# EAGLE board DP-webplatformv1.2 (EAGLE 5.07)
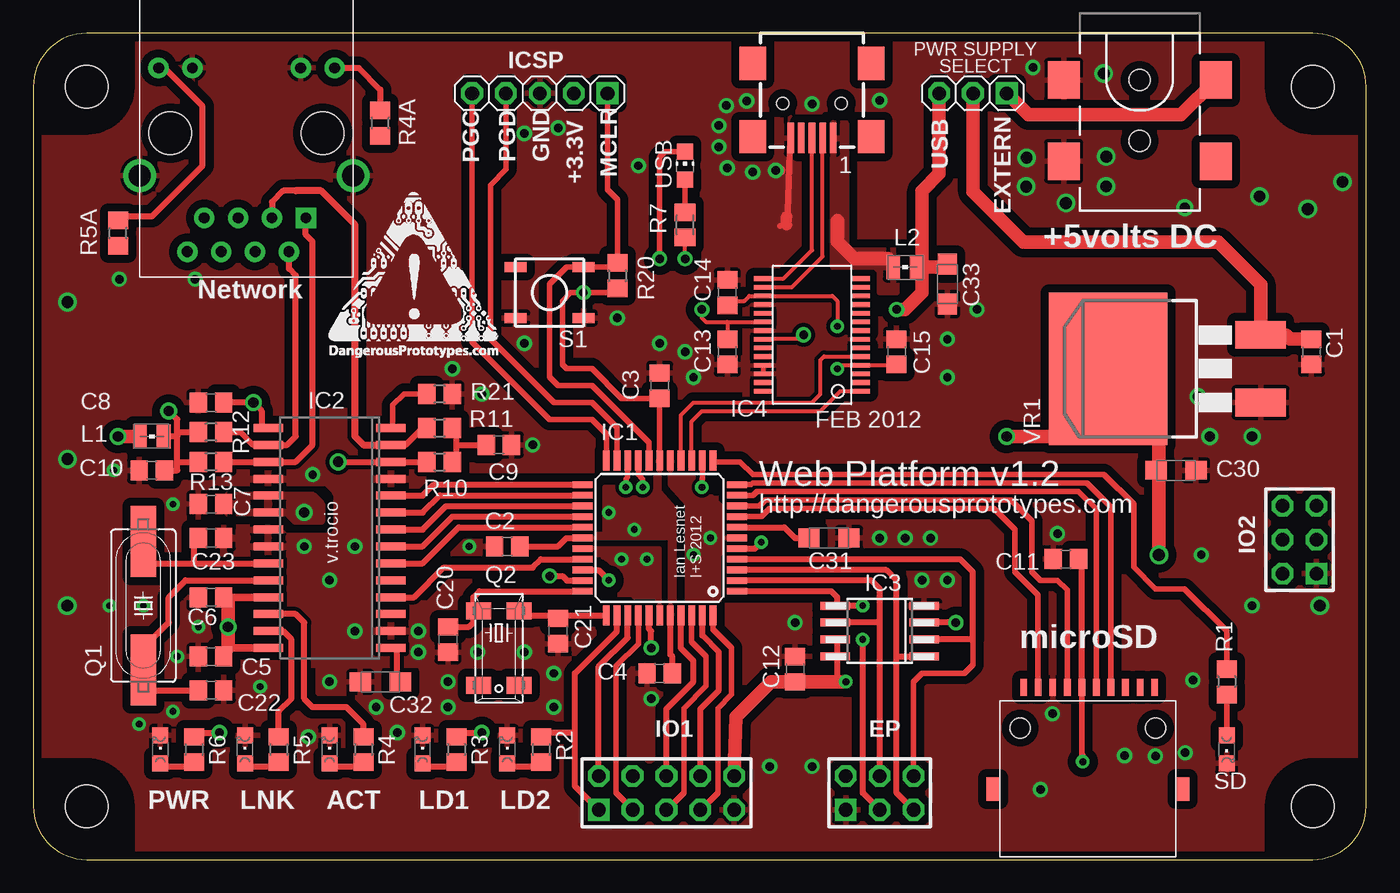
[diagram p0: board, top side]
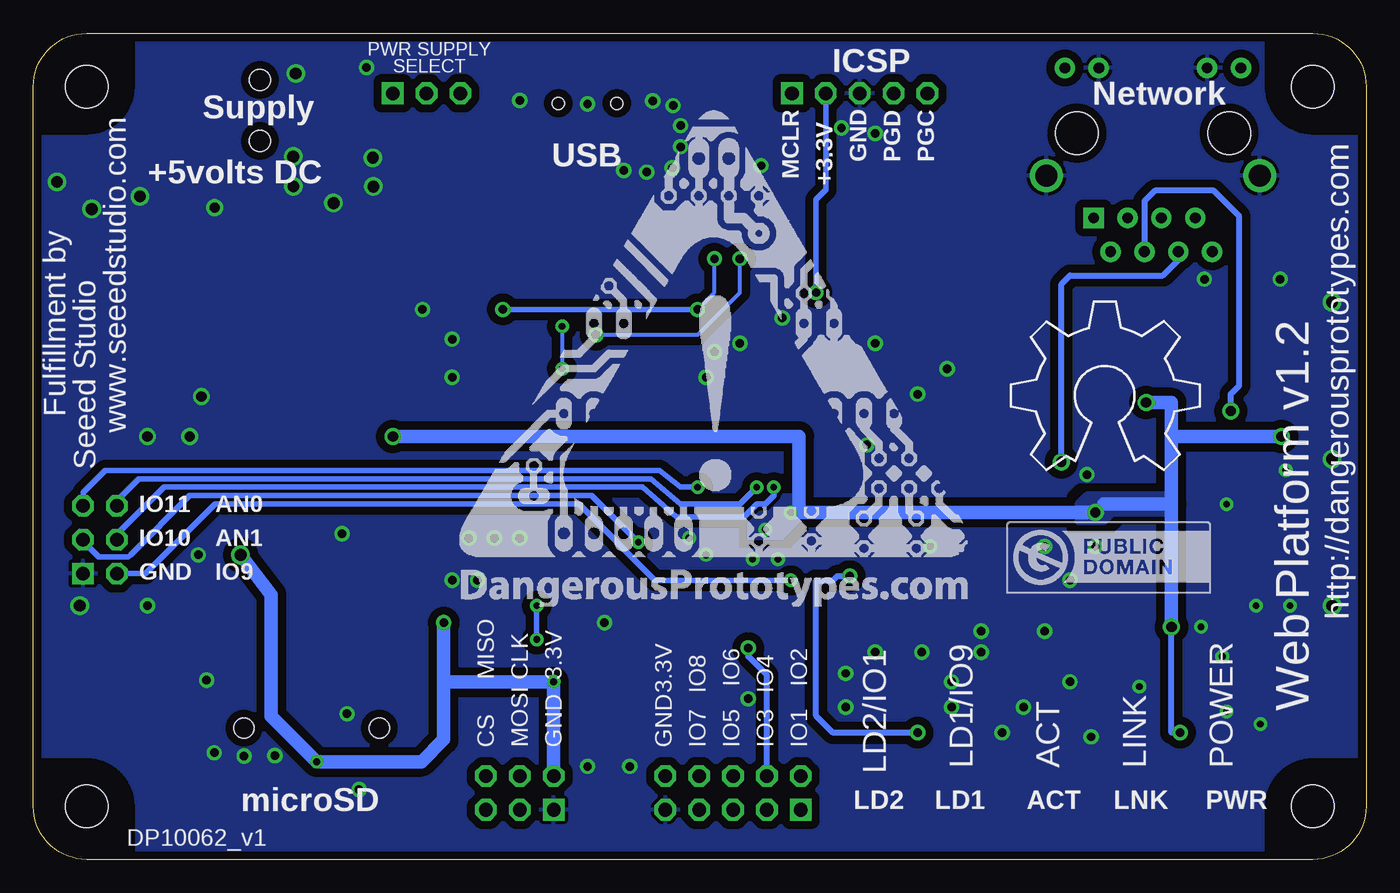
[diagram p1: board, bottom side, seen from below]

Size 100 x 62 mm. Coordinates in mm from the lower left corner, seen from the top.
Copper layers (1*16): Top 0.035mm / dielectric 1.5mm / Bottom 0.035mm
Design rules "SparkFun": minimum track width 8mil, minimum drill 20mil, track to track 8mil, track to pad 8mil, pad to pad 8mil, via to via 8mil, smd to smd 8mil, copper to edge 10mil, drill to drill 8mil, minimum pad ring 12mil, minimum via ring 10mil, stop-mask expansion 4mil, vias tented up to drill 25mil, thermal gap 10mil

## Footprints (pad centres in the part's own frame; a part is rotated, then mirrored left to right if it is on the bottom)
CHIPLED_0805 = smd 1.2 x 1.2: A 0,-1.05; C 0,1.05
C0805 = smd 1.3 x 1.5: 1 -0.95,0; 2 0.95,0
SMC_A = smd 1.6 x 1.4: + -1.5,0; - 1.5,0
CONN_USB_MINI-B = smd 0.5 x 2.3: D+ 0,2.6; D- -0.8,2.6; GND 1.6,2.6; P4 0.8,2.6; VUSB -1.6,2.6 | smd 2 x 2.5: PC1 -4.45,2.5; PC2 4.45,2.5; PC3 4.45,-3; PC4 -4.45,-3 | hole 0.9: -2.2,0; 2.2,0
2X03 = drill 1.016 square: 1 -2.54,-1.27 | drill 1.016 octagon: 2 -2.54,1.27; 3 0,-1.27; 4 0,1.27; 5 2.54,-1.27; 6 2.54,1.27
TQFP44 = smd 1.5 x 0.5: 1 -5.8,4; 2 -5.8,3.2; 3 -5.8,2.4; 4 -5.8,1.6; 5 -5.8,0.8; 6 -5.8,0; 7 -5.8,-0.8; 8 -5.8,-1.6; 9 -5.8,-2.4; 10 -5.8,-3.2; 11 -5.8,-4; 23 5.8,-4; 24 5.8,-3.2; 25 5.8,-2.4; 26 5.8,-1.6; 27 5.8,-0.8; 28 5.8,0; 29 5.8,0.8; 30 5.8,1.6; 31 5.8,2.4; 32 5.8,3.2; 33 5.8,4 | smd 0.5 x 1.5: 12 -4,-5.8; 13 -3.2,-5.8; 14 -2.4,-5.8; 15 -1.6,-5.8; 16 -0.8,-5.8; 17 0,-5.8; 18 0.8,-5.8; 19 1.6,-5.8; 20 2.4,-5.8; 21 3.2,-5.8; 22 4,-5.8; 34 4,5.8; 35 3.2,5.8; 36 2.4,5.8; 37 1.6,5.8; 38 0.8,5.8; 39 0,5.8; 40 -0.8,5.8; 41 -1.6,5.8; 42 -2.4,5.8; 43 -3.2,5.8; 44 -4,5.8
SO28W = smd 0.6 x 2.2: 1 -8.255,-4.6; 2 -6.985,-4.6; 3 -5.715,-4.6; 4 -4.445,-4.6; 5 -3.175,-4.6; 6 -1.905,-4.6; 7 -0.635,-4.6; 8 0.635,-4.6; 9 1.905,-4.6; 10 3.175,-4.6; 11 4.445,-4.6; 12 5.715,-4.6; 13 6.985,-4.6; 14 8.255,-4.6; 15 8.255,4.6; 16 6.985,4.6; 17 5.715,4.6; 18 4.445,4.6; 19 3.175,4.6; 20 1.905,4.6; 21 0.635,4.6; 22 -0.635,4.6; 23 -1.905,4.6; 24 -3.175,4.6; 25 -4.445,4.6; 26 -5.715,4.6; 27 -6.985,4.6; 28 -8.255,4.6
SO-08M = smd 0.6 x 2.2: 1 -1.905,-3.33; 2 -0.635,-3.33; 3 0.635,-3.33; 4 1.905,-3.33; 5 1.905,3.33; 6 0.635,3.33; 7 -0.635,3.33; 8 -1.905,3.33
SSOP28 = smd 0.348 x 1.397: 1 -4.225,-3.656; 2 -3.575,-3.656; 3 -2.925,-3.656; 4 -2.275,-3.656; 5 -1.625,-3.656; 6 -0.975,-3.656; 7 -0.325,-3.656; 8 0.325,-3.656; 9 0.975,-3.656; 10 1.625,-3.656; 11 2.275,-3.656; 12 2.925,-3.656; 13 3.575,-3.656; 14 4.225,-3.656; 15 4.225,3.656; 16 3.575,3.656; 17 2.925,3.656; 18 2.275,3.656; 19 1.625,3.656; 20 0.975,3.656; 21 0.325,3.656; 22 -0.325,3.656; 23 -0.975,3.656; 24 -1.625,3.656; 25 -2.275,3.656; 26 -2.925,3.656; 27 -3.575,3.656; 28 -4.225,3.656
1X05-S = drill 1.016 square: 1 -5.08,0 | drill 1.016 octagon: 2 -2.54,0; 3 0,0; 4 2.54,0; 5 5.08,0
2X05 = drill 1.016 square: 1 -5.08,-1.27 | drill 1.016 octagon: 2 -5.08,1.27; 3 -2.54,-1.27; 4 -2.54,1.27; 5 0,-1.27; 6 0,1.27; 7 2.54,-1.27; 8 2.54,1.27; 9 5.08,-1.27; 10 5.08,1.27
POWER_JACK_SMD = smd 2.8 x 2.4: GND 0,-5.7; P$4 6.1,-5.7; VIN0 0,5.7; VIN1 6.1,5.7 | hole 1.6: 0,0; 4.572,0
HR911105A = drill 0.813 pad 1.524 square: 1 4.445,-6.35 | drill 0.813 pad 1.524 round: 2 3.175,-8.89; 3 1.905,-6.35; 4 0.635,-8.89; 5 -0.635,-6.35; 6 -1.905,-8.89; 7 -3.175,-6.35; 8 -4.445,-8.89; 9 6.604,4.902; 10 4.064,4.902; 11 -4.064,4.902; 12 -6.604,4.902 | drill 1.651 pad 2.159 round: 13 8.001,-3.175; 14 -8.001,-3.175 | hole 3.2: 5.715,0; -5.715,0
1X03-S = drill 1.016 square: 1 -2.54,0 | drill 1.016 octagon: 2 0,0; 3 2.54,0
WE-KI_0805_B = smd 1.02 x 1.78: 1 -0.89,0; 2 0.89,0
DP10062_V1 = hole 3.2: 4,4; 96,4; 96,58; 4,58
HC49UP = smd 5.334 x 1.93: 1 -4.826,0; 2 4.826,0
MM20SS = smd 1.27 x 1.88: 1 -2.794,-1.524; 2 2.794,-1.524; 3 2.794,1.524; 4 -2.794,1.524
R0805 = smd 1.3 x 1.5: 1 -0.95,0; 2 0.95,0
M0805 = smd 1.3 x 1.6: 1 -0.95,0; 2 0.95,0
TACT_SWITCH_SMALL = smd 1.651 x 0.762: 1 -2.54,1.905; 2 2.54,1.905; 3 -2.54,-1.905; 4 2.54,-1.905
CHIP-LED0805 = smd 1.2 x 1.2: A 0,-1.05; C 0,1.05
MICROSD = smd 1.27 x 0.508: 1 0,-7.645; 2 0,-6.553; 3 0,-5.461; 4 0,-4.369; 5 0,-3.277; 6 0,-2.184; 7 0,-1.092; 8 0,0; 9 0,-8.738; 10 0,-9.83 | smd 1.778 x 1.016: RSV1 -7.62,2.286; RSV2 -7.62,-11.938 | hole 1.524: -3.048,-9.906; -3.048,0.254
D2PACK = smd 2.083 x 3.81: 1 -2.54,-8.89; 3 2.54,-8.89 | smd 11.43 x 8.89: 2 0,2.54

## Placement (x,y rotation side)
ACT  [CHIPLED_0805]  22.23,8.26 0 top
C1  0.1uF  [C0805]  95.89,38.1 270 top
C2  0.1uF  [C0805]  35.56,23.5 180 top
C3  0.1uF  [C0805]  46.99,35.56 90 top
C4  0.1uF  [C0805]  46.99,13.97 180 top
C5  0.1uF  [C0805]  13.34,15.24 180 top
C6  0.1uF  [C0805]  13.34,19.68 180 top
C7  0.1uF  [C0805]  13.34,26.67 180 top
C8  0.1uF  [C0805]  13.34,34.29 180 top
C9  0.1uF  [C0805]  34.92,31.11 0 top
C10  0.1uF  [C0805]  8.89,29.21 180 top
C11  0.1uF  [C0805]  77.47,22.54 180 top
C12  0.1uF  [C0805]  57.15,14.29 90 top
C13  0.1uF  [C0805]  52.07,38.1 270 top
C14  0.1uF  [C0805]  52.07,42.55 90 top
C15  0.1uF  [C0805]  64.77,38.1 90 top
C20  27pf  [C0805]  31.11,16.51 270 top
C21  27pf  [C0805]  39.37,17.14 270 top
C22  27pf  [C0805]  13.34,12.7 0 top
C23  27pf  [C0805]  13.34,24.13 0 top
C30  10uF  [SMC_A]  85.72,29.21 0 top
C31  10uF  [SMC_A]  59.69,24.13 0 top
C32  10uF  [SMC_A]  26.04,13.34 180 top
C33  10uF  [SMC_A]  68.58,43.18 270 top
CONN1  CONN_USB  [CONN_USB_MINI-B]  58.42,56.75 180 top
EP  [2X03]  63.5,5 0 top
IC1  PIC33FJ128GP204  [TQFP44]  46.99,24.13 180 top
IC2  ENC28J60-SO  [SO28W]  22.23,24.13 90 top
IC3  25SM  [SO-08M]  63.5,17.14 90 top
IC4  FT232RL  [SSOP28]  58.42,39.37 90 top
ICSP  [1X05-S]  38,57.5 180 top
IO1  [2X05]  47.5,5 0 top
IO2  [2X03]  95,24 90 top
J1  POWER_JACKSMD  [POWER_JACK_SMD]  83,58.5 270 top
J3  HR911105A  [HR911105A]  16,54.5 0 top
JP1  [1X03-S]  70.5,57.5 180 top
L1  [WE-KI_0805_B]  8.89,31.75 0 top
L2  100mA+ ferrite bead  [WE-KI_0805_B]  65.41,44.45 180 top
LD1  [CHIPLED_0805]  29.21,8.26 0 top
LD2  [CHIPLED_0805]  35.56,8.26 0 top
LINK  [CHIPLED_0805]  15.88,8.26 0 top
LOGO1  LOGO_CC-0  [LOGO_CC-0]  26.98,19.99 0 bottom
PCB1  PCB_DP_RECTANGLE-6.2X10  [DP10062_V1]  0,0 0 top
PWR  [CHIPLED_0805]  9.53,8.26 0 top
Q1  25Mhz  [HC49UP]  8.26,19.05 90 top
Q2  32.768khz  [MM20SS]  34.92,15.88 270 top
R1  1K1  [R0805]  89.53,13.34 270 top
R2  1K1  [R0805]  38.1,8.26 270 top
R3  1K1  [R0805]  31.75,8.26 270 top
R4  1K1  [R0805]  24.77,8.26 270 top
R4A  1K1  [R0805]  26.04,55.26 90 top
R5  1K1  [R0805]  18.41,8.26 270 top
R5A  1K1  [R0805]  6.35,47.01 90 top
R6  1K1  [R0805]  12.06,8.26 270 top
R7  1K1  [M0805]  48.9,47.62 270 top
R10  49R9 1%  [R0805]  30.48,29.84 0 top
R11  49R9 1%  [R0805]  30.48,32.38 0 top
R12  49R9 1%  [R0805]  13.34,32.07 180 top
R13  49R9 1%  [R0805]  13.34,29.84 180 top
R20  2K  [R0805]  43.81,43.81 270 top
R21  2K32  [R0805]  30.48,34.92 180 top
S1  [TACT_SWITCH_SMALL]  38.73,42.55 0 top
SD  [CHIPLED_0805]  89.53,8.26 180 top
U$2  [DP_LOGO_ART_0.5X0.5]  22.18,37.68 0 top
U$3  [OSHW_8X500_NOTEXT]  26.67,29.21 0 bottom
U$5  [DP_LOGO_ART_1.5X1.5]  68,19 0 bottom
USB  [CHIP-LED0805]  48.9,52.07 0 top
USD  MICROSD  [MICROSD]  74.3,12.91 90 top
VR1  LD117AD2MTR  [D2PACK]  83.19,36.83 90 top

## Library data of the parts
ACT LD1 LD2 LINK PWR SD USB = led
C1-C15 C20-C23 C30-C33 R1-R4 R4A R5 R5A R6 R10-R13 R20 R21 = rcl
CONN1 IC4 LOGO1 PCB1 S1 = dp_devices
EP ICSP IO1 IO2 JP1 = pinhead-2
IC1 IC3 = microchip
IC2 = microchip-enc28j60
J1 = SparkFun
J3 = CONNECTER
L1 L2 = wuerth-elektronik
Q1 Q2 = crystal
R7 = resistor
U$2 U$5 = DP2
U$3 = ohw-logo
USD = Seeed
VR1 = v-reg

## Nets
5V+: C13.1 C33.+ IC4.20 JP1.3 L2.1 R7.2
AN0: IC1.19 IO2.6
AN1: IC1.20 IO2.4
BUS_PWR: CONN1.VUSB L2.2
CCT: C10.1 J3.4 L1.2 R12.2 R13.2
CTS: IC4.11
EE-CLK: EP.4 IC1.2 IC3.6
EE-CS: EP.5 IC1.3 IC3.1
EE-MISO: EP.6 IC1.4 IC3.2
EE-MOSI: EP.3 IC1.1 IC3.5
ETH-CLK: IC1.25 IC2.8
ETH-CS: IC1.24 IC2.9
ETH-INT: IC1.30 IC2.4
ETH-MISO: IC1.27 IC2.6
ETH-MOSI: IC1.26 IC2.7
ETH-RST: IC1.23 IC2.10
GND: ACT.C C1.2 C2.2 C3.2 C4.2 C5.2 C6.2 C7.2 C8.2 C9.2 C10.2 C11.2 C12.2 C13.2 C14.2 C15.2 C20.2 C21.2 C22.2 C23.2 C30.- C31.- C32.- C33.- CONN1.GND EP.1 IC1.6 IC1.16 IC1.29 IC1.39 IC2.2 IC2.11 IC2.18 IC2.21 IC2.22 IC3.4 IC4.7 IC4.18 IC4.21 IC4.25 IC4.26 ICSP.3 IO1.9 IO2.1 J1.GND J1.P$4 J3.10 J3.11 J3.13 J3.14 LD1.C LD2.C LINK.C PWR.C R21.1 S1.3 S1.4 SD.C USD.6 VR1.1
LED1: IC1.32 R3.1
LED_A: IC2.27 R5.1
LED_A2: R5A.1
LED_B: IC2.26 R4.1
LED_B2: R4A.1
LED_LINK: J3.9 R4A.2
LED_STATUS: J3.12 R5A.2
MCLR: IC1.18 ICSP.1 R20.1 S1.2
N$5: C20.1 IC1.33 Q2.1
N$6: C32.+ IC2.1
N$7: IC2.14 R21.2
N$9: C22.1 IC2.24 Q1.1
N$10: R7.1 USB.A
N$11: R1.2 SD.A
N$12: C23.1 IC2.23 Q1.2
N$13: LD2.A R2.2
N$14: LINK.A R5.2
N$15: CONN1.D+ IC4.15
N$16: CONN1.D- IC4.16
N$17: C14.1 C15.1 IC4.4 IC4.17
N$18: C31.+ IC1.7
N$19: C21.1 IC1.34 Q2.4
N$20: ACT.A R4.2
N$22: C9.1 R10.2 R11.2
N$25: USD.8
N$28: LD1.A R3.2
N$29: PWR.A R6.2
N$34: USD.1
PGC: IC1.22 ICSP.5
PGD: IC1.21 ICSP.4
RA3: IC1.31 IO2.2
RA7: IC1.13 IO2.5
RA9: IC1.35 IO1.1 R2.1
RB5: IC1.41 IO1.6
RB6: IC1.42 IO1.5
RB7: IC1.43 IO1.8
RB8: IC1.44 IO1.7
RC3: IC1.36 IO1.2
RC4: IC1.37 IO1.3
RC5: IC1.38 IO1.4
RC9: IC1.5 IO2.3
RD+: IC2.13 J3.3 R11.1
RD-: IC2.12 J3.6 R10.1
RTS: IC4.3
RX: IC1.15 IC4.5
RXLED: IC4.22 USB.C
SDCLK: IC1.9 USD.5
SDCS: IC1.11 USD.2
SDLED: IC1.12 R1.1
SDMISO: IC1.8 USD.7
SDMOSI: IC1.10 USD.3
TD+: IC2.17 J3.1 R13.1
TD-: IC2.16 J3.2 R12.1
TX: IC1.14 IC4.1
V+: C2.1 C3.1 C4.1 C5.1 C6.1 C7.1 C8.1 C11.1 C12.1 C30.+ EP.2 IC1.17 IC1.28 IC1.40 IC2.15 IC2.19 IC2.20 IC2.25 IC2.28 IC3.3 IC3.7 IC3.8 ICSP.2 IO1.10 L1.1 R6.1 R20.2 USD.4 VR1.2
VBAT: C1.1 JP1.2 VR1.3
VEXT: J1.VIN0 JP1.1

## Tracks (layer width: path | path; a pad name or v marks a point on that pad's centre or on a via)
5V+  (via drill 0.64)
  Top 0.305: v48.9,45.09 R7.2 | 52.07,40.34 50.46,40.34 50.16,40.64 v50.16,41.27 | 52.07,40.34 IC4.20 | 52.07,40.34 C13.1
  Top 1.016: C33.+ 68.58,44.45 66.67,44.45 | 66.67,44.45 L2.1 66.67,44.83 66.67,50.16 67.96,51.45 JP1.3 | 66.67,44.45 66.67,42.55 65.41,41.27 v64.77,41.27
  Bottom 0.305: v48.9,45.09 48.9,42.55 v50.16,41.27
  Bottom 0.406: v50.16,41.27 v64.77,41.27
AN0  (via drill 0.51)
  Top 0.406: IC1.19 45.39,28.91 45.72,28.57 v45.72,27.94
  Bottom 0.406: v45.72,27.94 46.99,26.67 51.44,26.67 53.66,28.57 92.08,28.57 93.73,26.92 IO2.6
AN1  (via drill 0.51)
  Top 0.406: IC1.20 44.59,28.71 44.45,28.57 v44.45,27.94
  Bottom 0.406: 44.45,28.26 v44.45,27.94 44.45,27.3 45.09,26.67 45.72,26.67 46.67,25.72 51.75,25.72 54.29,27.94 90.17,27.94 93.73,24.38 IO2.4
BUS_PWR
  Top 1.016: 60.33,47.94 60.33,46.35 61.59,45.09 64.14,45.09
  pour Top: 60.01,55.26 60.96,55.26 60.96,45.72 64.77,45.72 64.77,42.55 63.5,42.55 63.5,44.13 63.18,44.45 60.01,44.45
CCT  (via drill 0.76)
  Top 0.457: 10.79,29.84 R13.2 | 10.79,29.84 10.79,31.75 | 10.79,31.75 10.79,32.07 | 10.79,32.07 10.79,33.02 v10.16,33.66 | 10.79,32.07 R12.2 | 10.79,31.75 L1.2 | C10.1 10.79,29.21 10.79,29.84
  Bottom 0.457: v10.16,33.66 10.16,34.92 9.53,35.56 9.53,48.27 11.43,50.18 15.88,50.18 16.64,49.42 J3.4
EE-CLK
  Top 0.457: EP.4 63.5,17.78 | 63.5,17.78 IC3.6 | IC1.2 62.89,20.93 63.5,20.32 63.5,17.78
EE-CS
  Top 0.457: 64.77,15.24 IC3.1 | IC1.3 63.99,21.73 64.77,20.95 64.77,15.24 | 64.77,15.24 64.77,5 EP.5
EE-MISO
  Top 0.406: EP.6 66.04,13.34 66.67,13.97 69.85,13.97 70.48,14.61 70.48,16.51
  Top 0.457: IC3.2 70.48,16.51 70.48,21.59 69.55,22.53 IC1.4
EE-MOSI  (via drill 0.51)
  Top 0.457: v62.23,19.05 IC3.5 60.33,19.2 60.33,19.68 59.88,20.13 IC1.1 | v62.23,16.51 62.23,5 EP.3
  Bottom 0.406: v62.23,16.51 v62.23,19.05
ETH-CLK
  Top 0.457: IC1.25 30.98,26.53 29.21,24.77 IC2.8
ETH-CS
  Top 0.457: IC1.24 30.5,27.33 29.21,26.04 IC2.9
ETH-INT
  Top 0.457: IC1.30 38.09,22.53 37.47,21.91 30.8,21.91 28.57,19.68 IC2.4
ETH-MISO
  Top 0.457: IC1.27 31.91,24.93 29.21,22.23 IC2.6
ETH-MOSI
  Top 0.406: IC2.7 27.3,23.5
  Top 0.457: IC1.26 31.45,25.73 29.21,23.5 27.3,23.5
ETH-RST
  Top 0.457: IC1.23 30.04,28.13 29.21,27.3 IC2.10
GND  (via drill 0.51, 0.64, 0.76, 0.89)
  Top 0.305: C13.2 52.07,36.83 | IC4.26 IC4.25
  Top 0.406: 56.24,47.73 56.03,47.52
  Top 0.457: CONN1.GND 56.58,47.56 56.52,47.62
  Top 0.813: v55.7,51.72 56.02,51.72 | 56.52,47.62 56.52,48.26
  other vias: 77.48,49.27 74.52,52.66 12.14,43.55 20.95,28.89 20.32,23.5 24.13,23.5 10.48,26.67 12.38,17.46 17.02,12.98 6.45,43.55 46.35,12.06 76.83,24.45 87.63,22.86 49.53,36.2 7.94,10.16 75.56,5.25 84.19,7.75 87,13.47 81.88,7.79 68.58,39.05 74.49,50.51 80.31,58.99 98.22,50.85 96.52,19.05 80.48,50.52 80.5,52.75 92,49.76 95.61,48.81 76.46,10.93 57.15,17.78 66.67,20.95 68.58,20.95 65.41,24.13 63.5,24.13 37.47,31.11 31.43,36.83 33.66,34.92 32.7,23.5 28.89,15.56 28.89,17.14 33.34,15.56 39.05,13.97 36.83,15.56 31.11,13.34 39.05,11.43 27.3,9.53 20.64,9.21 8.26,19.05 70.8,41.27 75,59.44 68.58,36.2 53.53,56.93 58.42,56.7 63.5,56.96 43.81,40.64 36.83,38.73 67.31,24.13 86.43,8.01 88.27,31.75 87.39,34.75 91.44,19.05 91.44,31.75 86.39,48.92 46.99,38.73 48.9,38.1 39.37,54.9 10.79,15.24 31.11,11.43 22.23,20.95 24.13,17.14 22.23,13.34 25.72,11.43 10.48,11.11 5.71,19.05 6.03,29.21 45.4,52.07 2.57,41.83 2.57,30.05 2.54,19.05 52,56.57 51.44,53.49 44.13,22.54 49.53,22.86 50.8,24.13 46.04,22.54 52.07,51.9 53.98,51.59 51.44,55.08 36.83,54.49 58.42,6.99 55.24,6.99
  pour Top (isolate 0.61, rank 2): 100.33,0 0,0 0,62.23 100.33,62.23
  pour Bottom (isolate 0.61, rank 2): 100.33,0 0,0 0,62.23 100.33,62.23
  pour Top (isolate 0.305): 53.34,43.18 62.23,43.18 62.23,34.29 53.34,34.29
  pour Top (isolate 0.254): 47.78,29.84 47.78,28.1 49.05,26.67 49.05,18.41 51.44,18.41 51.44,22.86 52.7,24.13 52.7,25.4 50.8,27.3 50.8,29.84
  pour Top (isolate 0.254): 41.27,23.34 41.27,22.86 43.18,22.86 45.09,20.95 45.09,19.68 46.83,19.68 46.83,19.05 46.99,19.05 46.99,23.34
  pour Top (isolate 0.305): 13.97,33.66 29.21,33.66 29.21,14.61 13.97,14.61 13.97,24.13 15.88,24.13 16.51,24.77 18.41,24.77 19.05,24.13 22.86,24.13 22.86,28.26 13.97,28.26
LED1  (via drill 0.64)
  Top 0.406: R3.1 32.29,9.53
  Top 0.457: IC1.32 40.03,20.93 39.69,21.27 v38.73,21.27 | 32.29,9.53 v33.66,9.53
  Bottom 0.457: v38.73,21.27 39.69,21.27 40.01,20.95 41.27,20.95 41.27,10.79 40.01,9.53 v33.66,9.53
LED_A
  Top 0.457: IC2.27 18.73,17.14 19.37,16.51 19.37,12.06 18.41,11.11 R5.1
LED_B
  Top 0.457: IC2.26 19.68,18.41 20.32,17.78 20.32,12.06 20.95,11.43 23.5,11.43 24.77,10.16 R4.1
LED_LINK
  Top 0.457: J3.9 24.42,59.4 26.04,57.78 R4A.2
LED_STATUS
  Top 0.457: R5A.2 6.67,48.27 8.9,48.27 12.7,52.07 12.7,56.52 9.81,59.4 J3.12
MCLR
  Top 0.406: IC1.18 46.19,31.28 41.91,35.56 39.37,35.56 38.73,36.2 38.73,43.18 40.01,44.45 S1.2 43.81,44.45 R20.1 43.81,49.53 43.5,49.85 43.18,50.16 43.08,50.27 ICSP.1
N$5
  Top 0.457: IC1.33 33.47,20.13 33.02,19.68 33.02,19.05 | 33.02,19.05 Q2.1 | 33.02,19.05 33.02,17.78 32.7,17.46 C20.1
N$6
  Top 0.457: IC2.1 27.3,15.88 27.3,13.56 C32.+
N$7
  Top 0.406: R21.2 27.8,34.94 26.98,34.11 26.98,32.46 IC2.14
N$9
  Top 0.457: IC2.24 11.43,20.95 10.16,19.68 10.16,17.78 8.26,15.88 Q1.1 8.26,12.7 C22.1
N$10
  Top 0.406: R7.1 USB.A
N$11
  Top 0.406: SD.A R1.2
N$12
  Top 0.457: 12.06,22.23 8.26,22.23 Q1.2 | 12.06,22.23 IC2.23 | C23.1 12.06,23.5 12.06,22.23
N$13
  Top 0.457: R2.2 38.1,6.99 35.78,6.99 LD2.A
N$14
  Top 0.457: R5.2 18.41,6.99 16.09,6.99 LINK.A
N$15
  Top 0.305: IC4.15 56.3,43.59 58.42,45.72 CONN1.D+
N$16
  Top 0.305: IC4.16 56.91,42.95 59.22,45.25 CONN1.D-
N$17  (via drill 0.51)
  Top 0.305: v60.33,40.01 60.33,41.91 59.94,42.3 IC4.17 53.73,42.3 53.34,41.91 52.38,41.91 C14.1 | v60.33,36.83 60.59,37.09 IC4.4 64.72,37.09 C15.1
  Bottom 0.305: v60.33,40.01 v60.33,36.83
N$18
  Top 0.457: IC1.7 56.35,24.93 57.15,24.13 C31.+
N$19
  Top 0.406: 39.09,17.86 C21.1 | Q2.4 36.66,18.56
  Top 0.457: 39.37,18.33 36.79,18.33 Q2.4 | 39.37,18.33 IC1.34 | 39.09,17.86 39.09,18.05 39.37,18.33
N$20
  Top 0.457: R4.2 24.77,6.99 22.45,6.99 ACT.A
N$22
  Top 0.457: R10.2 31.75,29.84 31.75,31.11 | R11.2 31.75,32.38 31.75,31.11 | 31.75,31.11 C9.1
N$28
  Top 0.457: R3.2 31.75,6.99 29.43,6.99 LD1.A
N$29
  Top 0.457: R6.2 12.06,6.99 9.74,6.99 PWR.A
PGC
  Top 0.406: IC1.22 42.99,31.94 41.91,33.02 38.73,33.02 33.34,38.42 33.02,38.73 32.92,38.84 ICSP.5
PGD
  Top 0.406: IC1.21 43.79,32.41 41.91,34.29 39.05,34.29 34.29,39.05 34.29,50.62 35.46,51.8 ICSP.4
RA3  (via drill 0.51)
  Top 0.457: IC1.31 42.41,21.73 v43.18,20.95
  Bottom 0.406: v43.18,20.95 53.34,20.95 59.05,26.67 86.36,26.67 91.57,21.46 IO2.2
RA7  (via drill 0.51)
  Top 0.406: IC1.13 50.19,28.6 50.16,28.57 v50.16,27.94
  Bottom 0.406: v50.16,27.94 51.44,27.94 53.02,29.21 94.61,29.21 96.27,27.55 IO2.5
RA9
  Top 0.457: IC1.35 43.79,17.12 40.64,13.97 40.64,9.5 | 38.1,9.53 R2.1 | 40.64,9.5 38.12,9.5 | 40.64,9.5 40.64,5.51 IO1.1
  Top 0.508: 38.12,9.5 38.1,9.53
RB5
  Top 0.457: IC1.41 48.59,15.86 49.53,14.92 49.53,13.34 47.5,11.3 IO1.6
RB6
  Top 0.406: IC1.42 49.39,16.33 50.48,15.24 50.48,13.02 48.82,11.35 48.82,5 47.55,3.73
  Top 0.457: IO1.5 47.55,3.73
RB7
  Top 0.457: IC1.43 50.19,16.8 51.44,15.56 51.44,12.7 50.04,11.3 IO1.8
RB8
  Top 0.406: IC1.44 50.99,17.27 52.39,15.88 52.39,12.38 51.36,11.35 51.36,5 50.09,3.73
  Top 0.457: IO1.7 50.09,3.73
RC3
  Top 0.457: IC1.36 44.59,16.65 42.42,14.48 IO1.2
RC4
  Top 0.406: IC1.37 45.39,16.18 43.74,14.53 43.74,5 44.96,3.78
  Top 0.457: IO1.3 44.96,3.78
RC5  (via drill 0.64)
  Top 0.457: IC1.38 46.19,17.31 46.35,17.14 v46.35,15.88
  Bottom 0.457: v46.35,15.88 46.35,15.24 44.96,13.85 IO1.4
RC9  (via drill 0.51)
  Top 0.457: IC1.5 54.13,23.33 v54.61,23.81
  Bottom 0.406: v54.61,23.81 58.1,27.3 88.27,27.3 92.71,22.86 | IO2.3 96.27,23.88 95.09,22.7 92.87,22.7 92.71,22.86 | 92.71,22.86
RD+
  Top 0.457: IC2.13 27.94,31.11 29.21,32.38 R11.1 | 19.68,50.18 18.75,50.18 17.91,49.34 J3.3
  Top 0.508: IC2.13 24.77,31.11 24.13,31.75 24.13,47.64 21.59,50.18 19.68,50.18
RD-  (via drill 0.76)
  Top 0.457: R10.1 IC2.12 v22.86,29.84
  Bottom 0.457: v22.86,29.84 22.86,43.2 22.23,43.83 15.24,43.83 14.1,44.98 J3.6
RX
  Top 0.305: IC4.5 59.34,37.74 59.05,37.47 59.05,34.92 58.42,34.29 49.53,34.29 48.59,33.35 IC1.15
RXLED  (via drill 0.64)
  Top 0.305: IC4.22 57.46,39.05 v57.78,39.37
  Top 0.406: USB.C 47.41,53.12 46.99,52.7 v46.99,45.09
  Bottom 0.305: v57.78,39.37 50.16,39.37 46.99,42.55 v46.99,45.09
SDCLK
  Top 0.406: USD.5 77.57,20.22 76.83,20.95 75.56,20.95 74.93,21.59 74.93,25.4 73.34,26.99 54.93,26.99 54.47,26.53 IC1.9
SDCS
  Top 0.406: USD.2 80.85,26.47 79.06,28.26 53.98,28.26 53.85,28.13 IC1.11
SDLED
  Top 0.406: IC1.12 51.03,29.93 | R1.1 89.53,17.14 86.36,20.32 84.19,20.32 82.55,21.95 82.55,26.67 80.33,28.89 53.98,28.89 53.02,29.84 51.12,29.84
  Top 0.457: 51.03,29.93 51.12,29.84
SDMISO
  Top 0.406: USD.7 75.39,19.86 73.66,21.59 73.66,24.77 72.07,26.35 55.24,26.35 54.62,25.73 IC1.8
SDMOSI
  Top 0.406: USD.3 79.76,26.29 78.42,27.62 54.29,27.62 54,27.33 IC1.10
TD+
  Top 0.457: R13.1 IC2.17 19.68,29.84 20.95,31.11 20.95,46.37 20.45,46.88 J3.1
TD-
  Top 0.457: R12.1 15.56,32.07 16.51,31.11 IC2.16 19.05,31.11 19.68,31.75 19.68,43.83 19.18,44.34 J3.2
TX
  Top 0.305: IC4.1 60.55,35.15 59.05,33.66 50.16,33.66 49.39,32.88 IC1.14
V+  (via drill 0.51, 0.64, 0.76, 0.89)
  Top 0.406: C6.1 14.58,19.58 | 17.12,32.28 IC2.15 | 14.26,34.37 C8.1 14.26,34.32 14.2,34.38 | 14.58,34.82 14.58,34.75 | R20.2 43.81,42.55 v41.27,42.55 40.32,42.55 39.69,41.91 39.69,37.15 40.01,36.83 41.91,36.83 44.13,34.61 C3.1 IC1.17 | USD.4 78.67,7.91 78.75,7.83 v78.74,7.33
  Top 0.457: USD.4 78.66,22.3 C11.1 | v69.22,17.78 IC3.3 | IC3.7 60.33,16.51 60.33,15.39 IC3.8 60.33,15.24 60.33,13.34 | IC1.40 47.79,15.39 47.94,15.24 47.94,14.61 C4.1 | IC1.28 40.01,24.13 39.37,23.5 C2.1 | 17.12,32.28 17.12,33.68 v16.51,34.29 C8.1 14.36,34.61 14.58,34.82 | R6.1 12.06,9.53 v13.97,9.53
  Top 0.559: 14.61,19.68 C6.1 14.61,19.36 | 14.61,19.68 IC2.25 | 14.58,19.58 14.58,19.66 14.61,19.68 | C5.1 14.61,15.56 14.61,15.88 IC2.28
  Top 0.61: 14.26,34.37 14.08,34.55
  Top 1.016: v60.96,13.34 60.33,13.34 C12.1 55.34,13.34 52.7,10.71 IO1.10 | v6.35,31.75 L1.1 | 14.61,19.36 v14.61,17.46 14.61,15.88 | v73.03,31.75 80.01,31.75 | 80.01,31.75 VR1.2 | 84.45,29.21 84.45,31.75 80.01,31.75 | 84.45,29.21 v84.45,22.86 | 84.45,29.21 C30.+
  Bottom 0.406: v41.27,42.55 41.27,49.53 40.54,50.27 ICSP.2
  Bottom 0.457: v13.97,9.53 14.61,9.53 v14.61,17.46
  Bottom 1.016: v84.45,22.86 82.14,19.86 82.14,10.74 v78.74,7.33 | 69.22,13.34 v69.22,17.78 | 69.22,13.34 v60.96,13.34 EP.2 | 14.61,31.75 v6.35,31.75 | v16.51,34.29 14.61,34.29 14.61,31.75 | v14.61,17.46 14.61,26.67 | 14.61,26.67 14.61,31.75 | 14.61,26.67 19.68,26.67 | v20.32,26.04 42.55,26.04 | 42.55,26.04 v43.18,26.04 | 42.55,26.04 42.55,31.75 v73.03,31.75 | v78.74,7.33 70.89,7.33 69.22,9 69.22,13.34 | v78.74,7.33
  other vias: 45.09,24.77
  pour Top (isolate 0.254): 42.86,27.94 46.67,27.94 46.67,29.84 46.99,29.84 46.99,27.62 48.1,26.35 48.1,18.41 47.78,18.41 47.78,24.13 41.27,24.13 41.27,24.45 42.86,24.45
  pour Top (isolate 0.305): 14.61,27.3 20.95,27.3 21.59,26.67 21.59,25.4 19.68,25.4 19.05,26.04 14.61,26.04
  pour Bottom (isolate 0.305): 42.55,25.4 42.55,27.3 46.35,27.3 46.35,24.13 43.81,24.13
  pour Bottom (isolate 0.305): 14.61,27.3 20.95,27.3 21.59,26.67 21.59,25.4 19.68,25.4 19.05,26.04 14.61,26.04
VBAT
  Top 1.016: C1.1 94.3,39.05 93.98,39.37 VR1.3 92.08,43.14 88.9,46.31 74.3,46.31 70.5,50.11 JP1.2
VEXT
  Top 1.016: JP1.1 74.66,55.88 86.08,55.88 J1.VIN0

## Text on the board
tPlace: PWR SUPPLY | SELECT
bPlace: PWR SUPPLY | SELECT
tNames: USB | EXTERN | USB | PGC | PGD | GND | +3.3V | MCLR | +5volts DC | Network | FEB 2012 | Web Platform v1.2 | http://dangerousprototypes.com | v.trocio | Ian Lesnet | I+S 2012 | microSD | SD | PWR | LNK | ACT | LD1 | LD2
bNames: ICSP | Network | Supply | www.seeedstudio.com | http://dangerousprototypes.com | PGC | PGD | GND | USB | +3.3V | MCLR | +5volts DC | Fulfillment by | Seeed Studio | AN0 | IO11 | AN1 | IO10 | IO9 | GND | 3.3V | CLK | MISO | IO2 | IO4 | IO6 | IO8 | 3.3V | Web Platform v1.2 | IO1 | IO3 | IO5 | IO7 | GND | GND | MOSI | CS | POWER | LINK | ACT | LD1/IO9 | LD2/IO1 | PWR | LNK | ACT | LD1 | LD2 | microSD
tValues: RA0 | RA1 | GND | V+ | GND | RB15 | MCLR | V+ | GND | PGD3 | PGC3
Reference: ICSP | +5volts DC | PWR supply | Network | Supply | USB | select | PGC | PGD | GND | MCLR | +3.3V | microSD | Indicator LEDs | WEB PLATFORM V1.2 | CC-0 | Ian Lesnet 2012 | http://dangerousprototypes.com